# Altium PCB roverDriveBrushless.PcbDoc
Units mm, origin at the board's own origin, x right, y up, seen from the top; angles counter-clockwise.
Board outline 70 x 60 mm, 4 copper layers (Top Layer, Int1 (GND), Int2 (PWR), Bottom Layer), stack 1.585 mm thick; 130 components, 70 nets, 426 pads, 0 vias.
Unrouted connection lines stored in the file: 288.
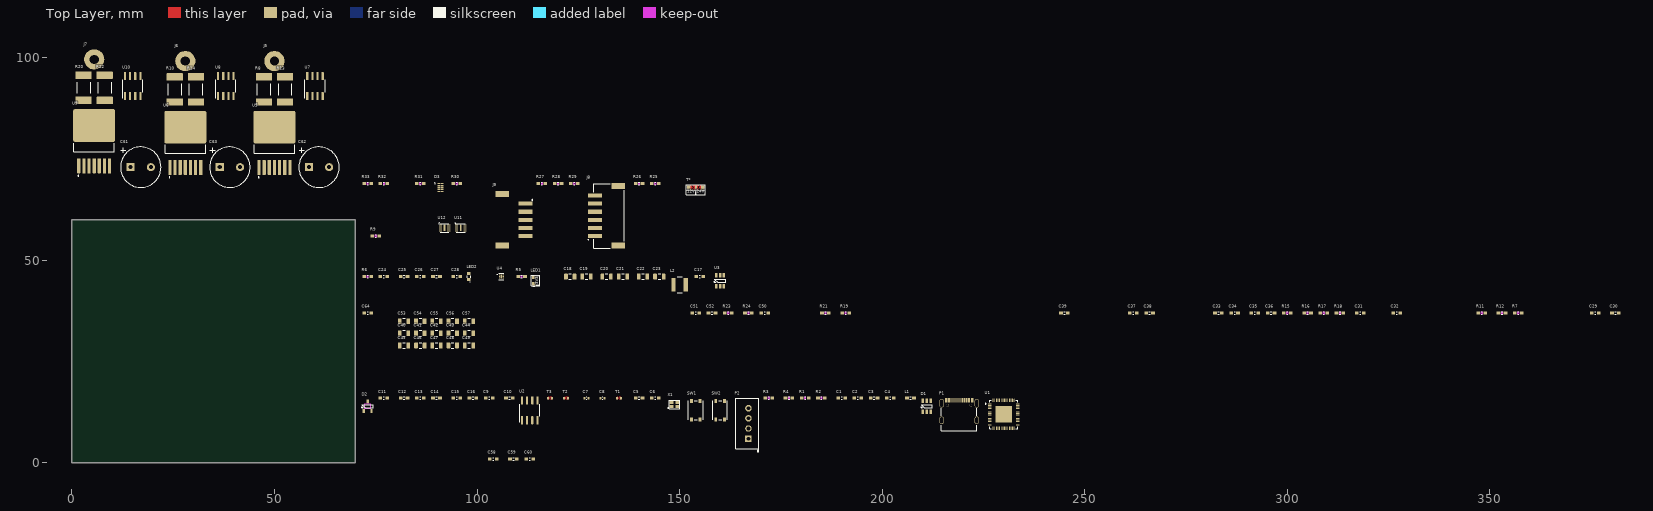
[diagram p0: Top Layer view]
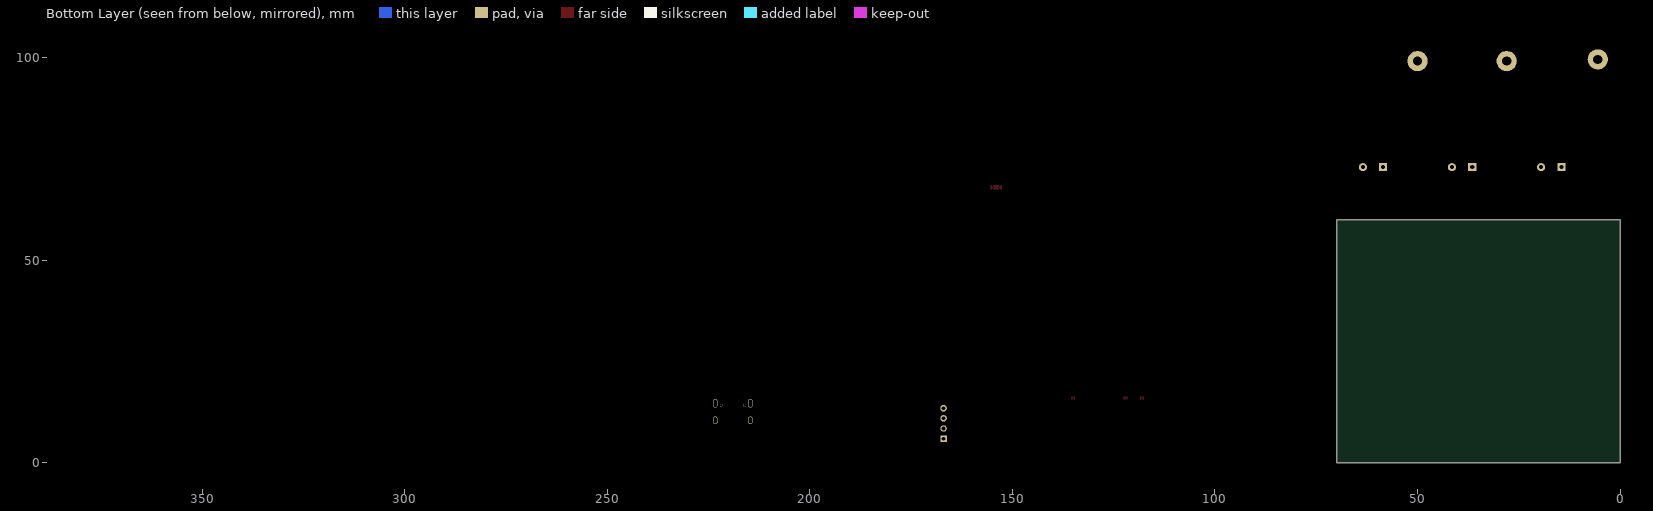
[diagram p1: Bottom Layer view, seen from below]

## Layer stack, top to bottom
Top Solder: solder mask 0.035, SM-001, Dk 4
Top Layer: signal copper 0.035
Dielectric 2: prepreg 0.21, PP-017, Dk 4.6
Int1 (GND): signal copper 0.015
Dielectric 3: core 1.065, Core-039, Dk 4.6
Int2 (PWR): signal copper 0.015
Dielectric 4: prepreg 0.21, PP-017, Dk 4.6
Bottom Layer: signal copper 0.035
Bottom Solder: solder mask 0.035, SM-001, Dk 4

## Board outline
0,0 70,0 70,60 0,60

## Design rules (kind name [scope] priority, off if disabled: settings)
BoardOutlineClearance [not(OnLayer('Top Overlay') OR OnLayer('Bottom Overlay'))] p1: gap=0.3 ignorepadtopadclearanceinfootprint=FALSE except(0: Text-OutlineEdge Text-CavityEdge Text-CutoutEdge Text-SplitBarrior Text-SplitContinuation)
Clearance Clearance_Power [InNetClass('Power')] p1: gap=0.127 ignorepadtopadclearanceinfootprint=FALSE
Clearance Clearance_signal [All] p2: gap=0.125 ignorepadtopadclearanceinfootprint=FALSE
ComponentClearance [All] p1 off: gap=0.254 collisioncheckmode=3 verticalgap=0.254 showdistances=FALSE
DiffPairsRouting eth_100 [Not InDifferentialPair('USB')] p1: maxlimit=0.254 minlimit=0.127 mostfreqgap=0.254 toplayer_maxgap=0.127 toplayer_prefgap=0.127 toplayer_minwidth=0.125 toplayer_maxwidth=0.125 toplayer_prefwidth=0.125 bottomlayer_maxgap=0.127 bottomlayer_prefgap=0.127 bottomlayer_minwidth=0.125 bottomlayer_maxwidth=0.125 bottomlayer_prefwidth=0.125 impedanceprofiledriven=TRUE impedanceprofileid={BED762A8-9934-435E-9BAB-1C0AACEE0ECA} impedanceprofilevalue=100.000000 maxuncoupledlength=12.7
DiffPairsRouting USB_diff [InDifferentialPair('USB') or InDifferentialPair('USB_ESP')] p2: maxlimit=0.254 minlimit=0.127 mostfreqgap=0.254 toplayer_maxgap=0.127 toplayer_prefgap=0.127 toplayer_minwidth=0.182 toplayer_maxwidth=0.182 toplayer_prefwidth=0.182 bottomlayer_maxgap=0.127 bottomlayer_prefgap=0.127 bottomlayer_minwidth=0.182 bottomlayer_maxwidth=0.182 bottomlayer_prefwidth=0.182 impedanceprofiledriven=TRUE impedanceprofileid={FA6609CF-BA32-4F74-B84B-CE5609EF71AF} impedanceprofilevalue=90.000000 maxuncoupledlength=12.7
HoleSize [All] p1 off: absolutevalues=TRUE maxlimit=2.54 minlimit=0.025 maxpercent=80.000 minpercent=20.000
MinimumSolderMaskSliver [All] p1 off: minsoldermaskwidth=0.254
PasteMaskExpansion [All] p1 off: expansion=0
PolygonConnect PolygonConnect_Power [InNetClass('Power')] p1: connectstyle=Direct reliefconductorwidth=0.254 reliefentries=4 polygonreliefangle="90 Angle" airgapwidth=0.254
PolygonConnect PolygonConnectGND [All vs InNet('GND')] p2: thpad.connectstyle=Relief thpad.reliefconductorwidth=0.4 thpad.reliefentries=4 thpad.polygonreliefangle="90 Angle" thpad.airgapwidth=0.18 smdpad.connectstyle=Relief smdpad.reliefconductorwidth=0.4 smdpad.reliefentries=4 smdpad.polygonreliefangle="90 Angle" smdpad.airgapwidth=0.18 via.connectstyle=Direct via.reliefconductorwidth=0.254 via.reliefentries=4 via.polygonreliefangle="90 Angle" via.airgapwidth=0.254
PolygonConnect [All] p3: connectstyle=Direct reliefconductorwidth=0.254 reliefentries=4 polygonreliefangle="90 Angle" airgapwidth=0.254
RoutingVias [All] p1: holewidth=0.3 width=0.5 viastyle="Through Hole" minholewidth=0.15 minwidth=0.25 maxholewidth=1 maxwidth=1.3
SilkToSolderMaskClearance [IsPad] p1 off: minsilkscreentomaskgap=0.254 clearancetoexposedcopper=TRUE
SolderMaskExpansion [All] p1 off: expansion=0.102 istentingtop=FALSE
Width Width_Power(5A) [InNetClass('Power')] p1: maxlimit=2 minlimit=0.2 preferedwidth=1.25
Width Width_signal [All] p2: maxlimit=1 minlimit=0.1 preferedwidth=0.2 minimp=50.000000 maximp=50.000000 favimp=50.000000
24 further rules are at their usual default settings.

## Classes and differential pairs
net class LOW_POWER: 3V3 5V
component class Sensors: D1 J5 J8 R1 R25 R26 R28 R29 R30 R31 R32 R33 T* U11 U12
component class MotorDriver: C29 C30 C31 C32 C33 C34 C35 C36 C37 C38 C39 C40 C41 C42 C43 C44 C45 C46 C47 C48 C49 C50 C51 C52 C53 C54 C55 C56 C57 C58 C59 C60 C61 C62 C63 C64 J5 J6 J7 R7 R8 R9 R10 R11 R12 R13 R14 R15 R16 R17 R18 R19 R20 R21 R22 R23 R24 U5 U6 U7 U8 U9 U10
differential pair class USB: USB
component class Power: C15 C17 C18 C19 C20 C22 C23 C24 C25 C26 C27 C28 L2 LED1 LED2 R5 R6 U3 U4
component class ESP32: C1 C2 C3 C4 C5 C6 C7 C8 C9 C10 C11 C12 C13 C14 C15 C16 D1 D2 L2 P2 R1 R2 R3 R4 SW1 T1 T3 U1 U2 X1
net class Power: NetR8_1 NetR10_1 NetR20_1 Phase_1 Phase_2 Phase_3
differential pair USB: +USB_P -USB_N

## Components (designator, comment, footprint, x,y, rotation, side; value= is the part's Value field where it differs from the comment)
C1 "Capacitor-0603-0.1uF-50V-X7R" CAPACITOR-0603 190,16 r0 top value=0.1uF
C2 "Capacitor-0603-0.1uF-50V-X7R" CAPACITOR-0603 194,16 r0 top value=0.1uF
C3 "Capacitor-0603-1uF-25V-X5R" CAPACITOR-0603 198,16 r0 top value=1uF
C4 "Capacitor-0603-10uF-10V-X5R" CAPACITOR-0603 202,16 r0 top value=10uF
C5 "Capacitor-0603-1uF-25V-X5R" CAPACITOR-0603 140,16 r0 top value=1uF
C6 "Capacitor-0603-0.1uF-50V-X7R" CAPACITOR-0603 144,16 r0 top value=0.1uF
C7 "Capacitor-0402-10pF-50V-C0G" CAPACITOR-0402 127,16 r0 top value=10pF
C8 "Capacitor-0402-10pF-50V-C0G" CAPACITOR-0402 131,16 r0 top value=10pF
C9 "Capacitor-0603-0.1uF-50V-X7R" CAPACITOR-0603 103,16 r0 top value=0.1uF
C10 "Capacitor-0603-10uF-10V-X5R" CAPACITOR-0603 108,16 r0 top value=10uF
C11 "Capacitor-0603-10nF-25V-X5R" CAPACITOR-0603 77,16 r0 top value=10nF
C12 "Capacitor-0603-1uF-25V-X5R" CAPACITOR-0603 82,16 r0 top value=1uF
C13 "Capacitor-0603-0.1uF-50V-X7R" CAPACITOR-0603 86,16 r0 top value=0.1uF
C14 "Capacitor-0603-0.1uF-50V-X7R" CAPACITOR-0603 90,16 r0 top value=0.1uF
C15 "Capacitor-0603-0.1uF-50V-X7R" CAPACITOR-0603 95,16 r0 top value=0.1uF
C16 "Capacitor-0603-1uF-25V-X5R" CAPACITOR-0603 99,16 r0 top value=1uF
C17 "Capacitor-0603-0.1uF-50V-X7R" CAPACITOR-0603 155,46 r0 top value=0.1uF
C18 "Capacitor-0805-10uF-35V-X5R" CAPACITOR-0805 123,46 r0 top value=10uF
C19 "Capacitor-0805-10uF-35V-X5R" CAPACITOR-0805 127,46 r0 top value=10uF
C20 "Capacitor-0805-22uF-16V-X5R" CAPACITOR-0805 132,46 r0 top value=22uF
C21 "Capacitor-0805-22uF-16V-X5R" CAPACITOR-0805 136,46 r0 top value=22uF
C22 "Capacitor-0805-22uF-16V-X5R" CAPACITOR-0805 141,46 r0 top value=22uF
C23 "Capacitor-0805-22uF-16V-X5R" CAPACITOR-0805 145,46 r0 top value=22uF
C24 "Capacitor-0603-1uF-25V-X5R" CAPACITOR-0603 77,46 r0 top value=1uF
C25 "Capacitor-0603-10uF-10V-X5R" CAPACITOR-0603 82,46 r0 top value=10uF
C26 "Capacitor-0603-10uF-10V-X5R" CAPACITOR-0603 86,46 r0 top value=10uF
C27 "Capacitor-0603-10uF-10V-X5R" CAPACITOR-0603 90,46 r0 top value=10uF
C28 "Capacitor-0603-10uF-10V-X5R" CAPACITOR-0603 95,46 r0 top value=10uF
C29 "Capacitor-0603-0.22uF-50V-X7R" CAPACITOR-0603 376,37 r0 top value=0.22uF
C30 "Capacitor-0603-0.22uF-50V-X7R" CAPACITOR-0603 381,37 r0 top value=0.22uF
C31 "Capacitor-0603-0.22uF-50V-X7R" CAPACITOR-0603 318,37 r0 top value=0.22uF
C32 "Capacitor-0603-0.22uF-50V-X7R" CAPACITOR-0603 327,37 r0 top value=0.22uF
C33 "Capacitor-0603-2.2uF-16V-X5R" CAPACITOR-0603 283,37 r0 top value=2.2uF
C34 "Capacitor-0603-0.1uF-50V-X7R" CAPACITOR-0603 287,37 r0 top value=0.1uF
C35 "Capacitor-0603-2.2uF-16V-X5R" CAPACITOR-0603 292,37 r0 top value=2.2uF
C36 "Capacitor-0603-0.1uF-50V-X7R" CAPACITOR-0603 296,37 r0 top value=0.1uF
C37 "Capacitor-0603-0.1uF-50V-X7R" CAPACITOR-0603 262,37 r0 top value=0.1uF
C38 "Capacitor-0603-0.1uF-50V-X7R" CAPACITOR-0603 266,37 r0 top value=0.1uF
C39 "Capacitor-0603-0.22uF-50V-X7R" CAPACITOR-0603 245,37 r0 top value=0.22uF
C40 "Capacitor-0805-10uF-50V-X5R" CAPACITOR-0805 82,32 r0 top value=10uF
C41 "Capacitor-0805-10uF-50V-X5R" CAPACITOR-0805 86,32 r0 top value=10uF
C42 "Capacitor-0805-10uF-50V-X5R" CAPACITOR-0805 90,32 r0 top value=10uF
C43 "Capacitor-0805-10uF-50V-X5R" CAPACITOR-0805 94,32 r0 top value=10uF
C44 "Capacitor-0805-10uF-50V-X5R" CAPACITOR-0805 98,32 r0 top value=10uF
C45 "Capacitor-0805-10uF-50V-X5R" CAPACITOR-0805 82,29 r0 top value=10uF
C46 "Capacitor-0805-10uF-50V-X5R" CAPACITOR-0805 86,29 r0 top value=10uF
C47 "Capacitor-0805-10uF-50V-X5R" CAPACITOR-0805 90,29 r0 top value=10uF
C48 "Capacitor-0805-10uF-50V-X5R" CAPACITOR-0805 94,29 r0 top value=10uF
C49 "Capacitor-0805-10uF-50V-X5R" CAPACITOR-0805 98,29 r0 top value=10uF
C50 "Capacitor-0603-0.22uF-50V-X7R" CAPACITOR-0603 171,37 r0 top value=0.22uF
C51 "Capacitor-0603-2.2uF-16V-X5R" CAPACITOR-0603 154,37 r0 top value=2.2uF
C52 "Capacitor-0603-0.1uF-50V-X7R" CAPACITOR-0603 158,37 r0 top value=0.1uF
C53 "Capacitor-0805-10uF-50V-X5R" CAPACITOR-0805 82,35 r0 top value=10uF
C54 "Capacitor-0805-10uF-50V-X5R" CAPACITOR-0805 86,35 r0 top value=10uF
C55 "Capacitor-0805-10uF-50V-X5R" CAPACITOR-0805 90,35 r0 top value=10uF
C56 "Capacitor-0805-10uF-50V-X5R" CAPACITOR-0805 94,35 r0 top value=10uF
C57 "Capacitor-0805-10uF-50V-X5R" CAPACITOR-0805 98,35 r0 top value=10uF
C58 "Capacitor-0603-0.1uF-50V-X7R" CAPACITOR-0603 104,1 r0 top value=0.1uF
C59 "Capacitor-0603-0.1uF-50V-X7R" CAPACITOR-0603 109,1 r0 top value=0.1uF
C60 "Capacitor-0603-0.1uF-50V-X7R" CAPACITOR-0603 113,1 r0 top value=0.1uF
C61 "CAP ALUM 680UF 20% 35V TH ESR 18mR" CAPACITOR-Aluminium-10.0x16mm-5mmPitch 17,73 r90 top value=680uF
C62 "CAP ALUM 680UF 20% 35V TH ESR 18mR" CAPACITOR-Aluminium-10.0x16mm-5mmPitch 61,73 r90 top value=680uF
C63 "CAP ALUM 680UF 20% 35V TH ESR 18mR" CAPACITOR-Aluminium-10.0x16mm-5mmPitch 39,73 r90 top value=680uF
C64 "Capacitor-0603-0.1uF-50V-X7R" CAPACITOR-0603 73,37 r0 top value=0.1uF
D1 "NUP4301MR6T1G" SOT-23-6 211,14 r0 top
D2 "ESDCAN24-2BLY" SOT-23-3 73,14 r0 top
D3 "D3V3F4U10LP-7" U-DFN2510-10 91,68 r0 top
J5 "hole" HOLE-M2-Bolt 50,99.2 r0 top
J6 "hole" HOLE-M2-Bolt 28,99.2 r0 top
J7 "hole" HOLE-M2-Bolt 5.5,99.6 r0 top
J8 "S6B-PH-SM4-TB(LF)(SN)" JST_S6B-PH-SM4-TB(LF)(SN) 132,61 r90 top
J9 "S5B-PH-SM4-TB" JST_S5B-PH-SM4-TB 112,60 r90 top
L1 "2506036007Y3" CAPACITOR-0603 207,16 r0 top value=60R@100MHz
L2 "ASPI-4030S-4R7M-T" INDUCTOR_ASPI-4030S-100M 150,44 r0 top value=4.7uH
LED1 "3147-B1911NG--20D000214U1930CT-ND" LED-0603-2PIN-SILKSCREEN 114,45 r90 top
LED2 "B1911USD-20D000114U1930" LED-0603-2PIN 98,46 r90 top
P1 "USB4105-GF-A" USB-C 219,13 r0 top
P2 "JST_XH_4_Pos" JST_XH_4_Pos 167,6 r90 top
R1 "Resistor-0603-5.1k" RESISTOR-0603 181,16 r0 top value=5.1k
R2 "Resistor-0603-5.1k" RESISTOR-0603 185,16 r0 top value=5.1k
R3 "SMT resistor" Resistor-0603 172,16 r0 top value=10k
R4 "SMT resistor" Resistor-0603 177,16 r0 top value=10k
R5 "SMT resistor" Resistor-0603 111,46 r0 top value=1k
R6 "SMT resistor" Resistor-0603 73,46 r0 top value=1k
R7 "SMT resistor" Resistor-0603 357,37 r0 top value=10k
R8 "SMT resistor" RESISTOR-2512 47.4,92.2 r90 top value=2mR
R9 "SMT resistor" Resistor-0603 75,56 r0 top value=10k
R10 "SMT resistor" RESISTOR-2512 25.4,92.2 r90 top value=2mR
R11 "SMT resistor" Resistor-0603 348,37 r0 top value=10k
R12 "SMT resistor" Resistor-0603 353,37 r0 top value=10k
R13 "SMT resistor" RESISTOR-2512 52.6,92.2 r90 top value=2mR
R14 "SMT resistor" RESISTOR-2512 30.6,92.2 r90 top value=2mR
R15 "SMT resistor" Resistor-0603 300,37 r0 top value=1k
R16 "SMT resistor" Resistor-0603 305,37 r0 top value=0
R17 "SMT resistor" Resistor-0603 309,37 r0 top value=1k
R18 "SMT resistor" Resistor-0603 313,37 r0 top value=0
R19 "SMT resistor" Resistor-0603 191,37 r0 top value=10k
R20 "SMT resistor" RESISTOR-2512 2.9,92.6 r90 top value=2mR
R21 "SMT resistor" Resistor-0603 186,37 r0 top value=10k
R22 "SMT resistor" RESISTOR-2512 8.1,92.6 r90 top value=2mR
R23 "SMT resistor" Resistor-0603 162,37 r0 top value=1k
R24 "SMT resistor" Resistor-0603 167,37 r0 top value=0
R25 "SMT resistor" Resistor-0603 144,69 r0 top value=1.69k
R26 "SMT resistor" Resistor-0603 140,69 r0 top value=3.3k
R27 "SMT resistor" Resistor-0603 116,69 r0 top value=4.7k
R28 "SMT resistor" Resistor-0603 120,69 r0 top value=4.7k
R29 "SMT resistor" Resistor-0603 124,69 r0 top value=4.7k
R30 "SMT resistor" Resistor-0603 95,69 r0 top value=1.69k
R31 "SMT resistor" Resistor-0603 86,69 r0 top value=3.3k
R32 "SMT resistor" Resistor-0603 77,69 r0 top value=1.69k
R33 "SMT resistor" Resistor-0603 73,69 r0 top value=3.3k
SW1 "PTS815 SJM 250 SMTR LFS" "SW4_PTS815 SJM 250 SMTR LFS_CNK" 154,13 r0 top
SW2 "PTS815 SJM 250 SMTR LFS" "SW4_PTS815 SJM 250 SMTR LFS_CNK" 160,13 r0 top
T1 "NetTie_0402" NetTie-0402 135,16 r0 top
T2 "NetTie_0402" NetTie-0402 122,16 r0 top
T3 "NetTie_0402" NetTie-0402 118,16 r0 top
T* "Jumper-3pos-small" Jumper-3pos-small-silkscreen 154,68 r0 top
U1 "ESP32-S3FN8-SOC" "VFQFN-56 Exposed Pad" 230,12 r0 top
U2 "SN65HVD232DR" SOIC-8 113,13 r0 top
U3 "AP63205WU-7" SOT-23-6 160,45 r0 top
U4 "NCP176AMX330TCG" "XFDFN-6 Exposed Pad" 106,46 r0 top
U5 "IFX007TAUMA1" DPAK127P1500X440-8N 50,79 r90 top
U6 "IFX007TAUMA1" DPAK127P1500X440-8N 28,79 r90 top
U7 "INA240A2QDRQ1" SOIC-8 60,93 r0 top
U8 "INA240A2QDRQ1" SOIC-8 38,93 r0 top
U9 "IFX007TAUMA1" DPAK127P1500X440-8N 5.5,79.4 r90 top
U10 "INA240A2QDRQ1" SOIC-8 15,93 r0 top
U11 "LM358QT" DFN8-2x2 96,58 r0 top
U12 "LM358QT" DFN8-2x2 92,58 r0 top
X1 "CX2016DB40000D0FLJCC" 4-SMD 148,15 r0 top

## Footprints (in the part's own frame and the unit in brackets; to place one, negate y for a bottom-side part, rotate by r counter-clockwise, add the part's x,y. Pads: shape width x height; smd on the part's side, far side on the other; paste and mask are expansions set on the pad)
4-SMD [mm]
  rect 0.9x0.8 smd: 1(0,-1.1) 2(1.4,-1.1) 3(1.4,0) 4(0,0)
  silkscreen extent -0.87,-1.6 2,0.5
CAPACITOR-0402 [mm] "Metric 1005, EIA 0402. Per Yageo Product Specification V2.6"
  rrect15% 0.5x0.6 smd: 1(-0.5,0) 2(0.5,0)
  Top Layer pour cut-out: -0.3,0.25 0.3,0.25 0.3,-0.25 -0.3,-0.25
  silkscreen extent -0.05,-0.3 0.05,0.3, body extent -0.5,-0.27 0.5,0.28, height 0.51
CAPACITOR-0603 [mm] "Metric 1608, EIA 0603. Per Yageo Product Specification V2.2"
  rrect15% 0.9x0.8 smd: 1(-0.85,0) 2(0.85,0)
  Top Layer pour cut-out: -0.2,0.2 0.2,0.2 0.2,-0.2 -0.2,-0.2
  silkscreen extent -0.15,-0.3 0.15,0.3, body extent -0.93,-0.41 0.93,0.41, height 0.81
CAPACITOR-0805 [mm] "Metric 2012, EIA 0805, Per Yageo Product Specification V2.2"
  rrect15% 0.9x1.4 smd: 1(-1.05,0) 2(1.05,0)
  silkscreen extent -0.3,-0.7 0.3,0.7, body extent -1.09,-0.64 1.09,0.64, height 1.26
CAPACITOR-Aluminium-10.0x16mm-5mmPitch [mm] "10.0mm dia x 13mm height Capacitor"
  rect 2x2 hole 1: 1(0,2.5)
  round 2 hole 1: 2(0,-2.5)
  silkscreen extent -5,-5 5,5, body extent -5,-4.98 5,4.99, height 18
DFN8-2x2 [mm]
  rect 0.75x0.3 smd mask+0.08: 1(-1.02,0.75) 2(-1.02,0.25) 3(-1.02,-0.25) 4(-1.02,-0.75) 5(1.02,-0.75) 6(1.02,-0.25) 7(1.02,0.25) 8(1.02,0.75)
  rect 0.45x1.6 smd: 9(0,0)
  silkscreen extent -1.43,-1.08 1.08,1.23, body extent -1,-1 1,1, height 0.6
DPAK127P1500X440-8N [mm]
  rrect25% 3.67x0.79 smd: 1(-6.07,3.81) 2(-6.07,2.54) 3(-6.07,1.27) 4(-6.07,0) 5(-6.07,-1.27) 6(-6.07,-2.54) 7(-6.07,-3.81)
  rrect10% 8.04x10.37 smd paste-6: 8(3.89,0)
  silkscreen extent -8.6,-5 -0.44,5, body extent -7.41,-5 7.54,5, height 4.4
HOLE-M2-Bolt [mm] "Hole M2 Bolt"
  round 5 hole 2.3: 1(0,0)
INDUCTOR_ASPI-4030S-100M [mm]
  rect 1.1x3.4 smd: 1(-1.5,0) 2(1.5,0)
  silkscreen extent -0.64,-2 0.64,2, body extent -2,-2 2,2, height 3
JST_S5B-PH-SM4-TB [mm]
  rect 1x3.5 smd: 1(4,0) 2(2,0) 3(0,0) 4(-2,0) 5(-4,0)
  rect 1.5x3.4 smd: P1(6.35,5.75) P2(-6.35,5.75)
  silkscreen extent 4.77,-1.73 5.03,-1.47, body extent -6.95,-1.14 6.95,7.46, height 5.6
JST_S6B-PH-SM4-TB(LF)(SN) [mm]
  rect 1x3.5 smd: 1(-5,2.875) 2(-3,2.875) 3(-1,2.875) 4(1,2.875) 5(3,2.875) 6(5,2.875)
  rect 1.5x3.4 smd: S1(-7.35,-2.875) S2(7.35,-2.875)
  silkscreen extent -7.95,-4.38 7.95,4.58, body extent -7.87,-4.35 8.03,4.25, height 5.5
JST_XH_4_Pos [mm]
  rect 1.6x1.6 hole 0.9: 1(0,0)
  round 1.6 hole 1: 2(2.5,0)
  round 1.6 hole 0.9: 3(5,0) 4(7.5,0)
  silkscreen extent -3.3,-2.6 10,3.1, body extent -2.45,-2.35 9.95,3.4, height 7
Jumper-3pos-small-silkscreen [mm] "3 pos selection"
  rect 0.9x1 smd paste+0 mask+0.102: 1(-1.7,0) 2(1.7,0)
  rect 0.5x1 smd paste+0: 3(0,0)
  Top Layer region: 0,0.5 0.75,0.5 0.625,0.3 0.425,0 0.625,-0.3 0.75,-0.5 0,-0.5
  Top Layer region: 1.35,0.5 1.125,0.5 1,0.3 0.8,0 1,-0.3 1.125,-0.5 1.35,-0.5
  Top Layer region: 0,0.5 -0.75,0.5 -0.625,0.3 -0.425,0 -0.625,-0.3 -0.75,-0.5 0,-0.5
  Top Layer region: -1.35,0.5 -1.125,0.5 -1,0.3 -0.8,0 -1,-0.3 -1.125,-0.5 -1.35,-0.5
  silkscreen extent -2.3,-1.8 2.3,0.7
LED-0603-2PIN [mm] "Metric 1608, EIA 0603. Per Yageo Product Specification V2.2"
  rrect15% 0.8x0.9 smd: 1(-0.75,0) 2(0.75,0)
  Top Layer pour cut-out: -0.35,0.45 0.35,0.45 0.35,-0.45 -0.35,-0.45
  silkscreen extent -1.22,-0.45 0.25,0.45, body extent -0.8,-0.4 0.8,0.4, height 0.8
LED-0603-2PIN-SILKSCREEN [mm] "Metric 1608, EIA 0603. Per Yageo Product Specification V2.2"
  rrect15% 0.8x0.9 smd: 1(-0.75,0) 2(0.75,0)
  Top Layer pour cut-out: -0.35,0.45 0.35,0.45 0.35,-0.45 -0.35,-0.45
  silkscreen extent -1.35,-1.5 1.3,0.6, body extent -0.8,-0.4 0.8,0.4, height 0.8
NetTie-0402 [mm] "Metric 1005, EIA 0402 Drawn per Yageo \"Chip resistors Mounting\" rev 10"
  rrect15% 0.5x0.6 smd: 1(-0.5,0) 2(0.5,0)
  Top Layer region: 0.475,0.3 0.05,0.3 0.25,0 0.05,-0.3 0.375,-0.3 0.475,-0.3
  Top Layer region: -0.375,0.3 -0.225,0.3 -0.025,0 -0.225,-0.3 -0.375,-0.3
  body extent -0.51,-0.25 0.51,0.25, height 0.51
RESISTOR-0603 [mm] "Metric 1608, EIA 0603 Drawn per Yageo \"Chip resistors Mounting\" rev 10"
  rrect15% 0.9x0.8 smd: 1(-0.85,0) 2(0.85,0)
  Top Layer pour cut-out: -0.2,0.2 0.2,0.2 0.2,-0.2 -0.2,-0.2
  Top Layer keep-out region: -0.2,-0.2 0.2,-0.2 0.2,0.2 -0.2,0.2
  silkscreen extent -0.15,-0.3 0.15,0.3, body extent -0.8,-0.4 0.8,0.4, height 0.55
Resistor-0603 [mm] "Metric 1608, EIA 0603 Drawn per Yageo \"Chip resistors Mounting\" rev 10"
  rrect15% 0.9x0.8 smd: 1(-0.85,0) 2(0.85,0)
  Top Layer pour cut-out: -0.2,0.2 0.2,0.2 0.2,-0.2 -0.2,-0.2
  Top Layer keep-out region: -0.2,-0.2 0.2,-0.2 0.2,0.2 -0.2,0.2
  silkscreen extent -0.15,-0.3 0.15,0.3, body extent -0.8,-0.4 0.8,0.4, height 0.55
RESISTOR-2512 [mm] "Metric 6432, EIA 2512 Drawn per Yageo \"Chip resistors Mounting\" rev 10"
  rrect10% 1.8x4 smd: 1(-3.1,0) 2(3.1,0)
  Top Layer pour cut-out: -2.3,2 2.3,2 2.3,-2 -2.3,-2
  silkscreen extent -1.4,-1.6 1.4,1.6, body extent -3.2,-1.6 3.2,1.6, height 0.6
SOIC-8 [mil] "8-Lead Plastic Small Outline, 0.15in pitch,  LTC DWG # 05-08-1610 Rev G"
  rrect25% 21x78 smd: 1(-75,-97) 2(-25,-97) 3(25,-97) 4(75,-97) 5(75,97) 6(25,97) 7(-25,97) 8(-75,97)
  silkscreen extent -98,-118 98,60, body extent -98,-122 98,122, height 69
SOT-23-3 [mm] "SOT23-3, from TI DBZ (R-PDSO-G3)"
  rrect15% 0.6x1.05 smd: 1(-0.95,-1.185) 2(0.95,-1.185) 3(0,1.185)
  Top Layer keep-out region: -0.8,-0.5 0.8,-0.5 0.8,0.5 -0.8,0.5
  silkscreen extent -1.4,-0.4 1.4,0.4, body extent -1.45,-1.21 1.45,1.21, height 0.98
SOT-23-6 [mm] "SOT23-6, from TI DDC (R-PDSO-G6)"
  rrect15% 0.6x1.1 smd: 1(-0.95,-1.35) 2(0,-1.35) 3(0.95,-1.35) 4(0.95,1.35) 5(0,1.35) 6(-0.95,1.35)
  silkscreen extent -1.4,-0.4 1.4,0.4, body extent -1.5,-1.37 1.5,1.38, height 1.1
"SW4_PTS815 SJM 250 SMTR LFS_CNK" [mm]
  rect 0.711x0.991 smd paste+0: 1(1.075,2.25) 2(1.075,-2.25) 3(-1.075,2.25) 4(-1.075,-2.25)
  silkscreen extent -1.8,-2.35 1.8,2.32, body extent -1.83,-2.32 1.83,2.32, height 3
U-DFN2510-10 [mm]
  rect 0.625x0.25 smd mask+0.05: 1(-0.387,1) 2(-0.387,0.5) 4(-0.387,-0.5) 5(-0.387,-1) 6(0.387,-1) 7(0.387,-0.5) 9(0.387,0.5) 10(0.387,1)
  rect 0.7x0.45 smd mask+0.05: 3(-0.35,0)
  rect 0.575x0.45 smd mask+0.05: 8(0.413,0)
  silkscreen extent -1.49,0.9 -1.29,1.1, body extent -0.5,-1.25 0.5,1.25, height 0.61
USB-C [mm]
  oval 1x1.9 hole 0.6 slot 1.5 at 90 deg: 13(-4.325,-2.481) 13(4.325,-2.481)
  oval 1x2.1 hole 0.6 slot 1.8 at 90 deg: 13(-4.325,1.719) 13(4.325,1.719)
  rect 0.6x1.15 smd mask+0.08: A1B12(-3.2,2.481) A4B9(-2.4,2.481) B1A12(3.2,2.481) B4A9(2.4,2.481)
  rect 0.3x1.15 smd mask+0.08: A5(-1.25,2.481) A6(-0.25,2.481) A7(0.25,2.481) A8(1.25,2.481) B5(1.75,2.481) B6(0.75,2.481) B7(-0.75,2.481) B8(-1.75,2.481)
  round 0.65 hole 0.65 unplated: ""(-2.89,1.219) ""(2.89,1.219)
  silkscreen extent -4.4,-5.08 4.4,0.44, body extent -4.47,-5.08 4.47,2.52, height 3.28
"VFQFN-56 Exposed Pad" [mm] "56-QFN (7x7) ESP32S3"
  rrect25% 0.81x0.22 smd: 1(-3.445,2.6) 2(-3.445,2.2) 3(-3.445,1.8) 4(-3.445,1.4) 5(-3.445,1) 6(-3.445,0.6) 7(-3.445,0.2) 8(-3.445,-0.2) 9(-3.445,-0.6) 10(-3.445,-1) 11(-3.445,-1.4) 12(-3.445,-1.8) 13(-3.445,-2.2) 14(-3.445,-2.6) 29(3.445,-2.6) 30(3.445,-2.2) 31(3.445,-1.8) 32(3.445,-1.4) 33(3.445,-1) 34(3.445,-0.6) 35(3.445,-0.2) 36(3.445,0.2) 37(3.445,0.6) 38(3.445,1) 39(3.445,1.4) 40(3.445,1.8) 41(3.445,2.2) 42(3.445,2.6)
  rrect25% 0.22x0.81 smd: 15(-2.6,-3.445) 16(-2.2,-3.445) 17(-1.8,-3.445) 18(-1.4,-3.445) 19(-1,-3.445) 20(-0.6,-3.445) 21(-0.2,-3.445) 22(0.2,-3.445) 23(0.6,-3.445) 24(1,-3.445) 25(1.4,-3.445) 26(1.8,-3.445) 27(2.2,-3.445) 28(2.6,-3.445) 43(2.6,3.445) 44(2.2,3.445) 45(1.8,3.445) 46(1.4,3.445) 47(1,3.445) 48(0.6,3.445) 49(0.2,3.445) 50(-0.2,3.445) 51(-0.6,3.445) 52(-1,3.445) 53(-1.4,3.445) 54(-1.8,3.445) 55(-2.2,3.445) 56(-2.6,3.445)
  rect 4x4 smd paste-3: 57(0,0)
  silkscreen extent -4.55,-3.5 3.5,3.5, body extent -3.5,-3.5 3.5,3.5, height 0.9
"XFDFN-6 Exposed Pad" [mm]
  rrect25% 0.31x0.25 smd: 1(-0.455,0.4) 2(-0.455,0) 3(-0.455,-0.4) 4(0.455,-0.4) 5(0.455,0) 6(0.455,0.4)
  rect 0.3x0.94 smd paste-1: 7(0,0)
  silkscreen extent -1.05,-0.84 0.63,0.84, body extent -0.62,-0.62 0.62,0.62, height 0.46

## Part data
C1 C2 C6 C9 C13 C14 C15 C17 C34 C36 C37 C38 C52 C58 C59 C60 C64: Package / Case="Metric 1608, EIA 0603", Supplier Part Number 1=1276-1935-2-ND, Volt=50V, Mounted=Yes, Precision=X7R-10%, Supplier 1=Digi-Key, Supplier 2=Digi-Key, Supplier Part Number 2=1276-1934-2-ND
C3 C5 C12 C16 C24: Package / Case="Metric 1608, EIA 0603", Supplier Part Number 1=1276-1859-2-ND, Volt=25V, Mounted=Yes, Precision=X5R-10%, Supplier 1=Digi-Key, Supplier 2=Digi-Key, Supplier Part Number 2=1276-1942-2-ND
  C5 C24: Supplier 3=Digi-Key, Supplier 4=Digi-Key
C4 C10 C25 C26 C27 C28: "10 µF ±20% 10V Ceramic Capacitor X5R 0603 (1608 Metric)", Package / Case="Metric 1608 , EIA 0603", Supplier Part Number 1=4713-GMC10X5R106M10NTCT-ND, Volt=10V, Mounted=Yes, Precision=20%, Supplier 1=Digikey
C7 C8: Package / Case="0402 (1005 Metric)", Supplier Part Number 1=399-C0402C100K5GAC7867CT-ND, Volt=50V, HelpURL=https://connect.kemet.com:7667/gateway/IntelliData-ComponentDocumentation/1.0/download/datasheet/C0402C100K5GACTU, Mounted=Yes, Precision="C0G - 10%", Supplier 1=Digi-Key, Supplier 2=Digi-Key
C11: "10000 pF ±10% 25V Ceramic Capacitor X5R 0603 (1608 Metric)", Package / Case="Metric 1608 , EIA 0603", Supplier Part Number 1=478-KGM15AR51E103KTCT-ND, Volt=25V, Mounted=Yes, Precision=X5R-10%, Supplier 1=Digikey
C18 C19: Package / Case="Metric 2012 , EIA 0805", Supplier Part Number 1=490-10515-1-ND, Volt=35V, Mounted=Yes, Precision=X5R-10%, Supplier 1=Digi-Key, Supplier 2=Digi-Key
C20 C21 C22 C23: Package / Case="Metric 2012 , EIA 0805", Supplier Part Number 1=1276-6780-1-ND, Volt=16V, Mounted=Yes, Precision=X5R-10%, Supplier 1=Digi-Key, Supplier 2=Digi-Key
C29 C30 C31 C32 C39 C50: Package / Case="Metric 1608, EIA 0603", Supplier Part Number 1=1276-6600-1-ND, Volt=50V, Mounted=Yes, Precision=X7R-10%, Supplier 1=Digi-Key, Supplier 2=Digi-Key
C33 C35 C51: "2.2 µF ±10% 16V Ceramic Capacitor X5R 0603 (1608 Metric)", Package / Case="Metric 1608 , EIA 0603", Supplier Part Number 1=1276-1040-1-ND, Volt=16V, Mounted=Yes, Precision=X5R-10%, Supplier 1=Digikey
C40 C41 C42 C43 C44 C45 C46 C47 C48 C49 C53 C54 C55 C56 C57: Package / Case="Metric 2012 , EIA 0805", Supplier Part Number 1=490-18663-1-ND, Volt=50V, Mounted=Yes, Precision=X5R-10%, Supplier 1=Digi-Key, Supplier 2=Digi-Key
C61 C62 C63: library part Capacitor-680uF-35V-TH, Supplier Part Number 1=399-A750MW687M1VAAE018-ND, Volt=35V, ESR=18mR, Mounted=Yes, Precision=20%, Supplier 1=Digi-Key, Supplier 2=Digi-Key
D1: "4CH Clamp Ipp Tvs Diode Surface Mount SOT23-6 (SC74)", Package / Case=SOT23-6, Supplier Part Number 1=NUP4301MR6T1GOSTR-ND, Volt=70, Mounted=Yes, Supplier 1=Digi-Key
D2: "55V Clamp 6A (8/20µs) Ipp Tvs Diode Surface Mount SOT-23", Package / Case=SOT-23-3, Supplier Part Number 1=5272-ESDCAN24-2BLYCT-ND, Volt=24, Mounted=Yes, Supplier 1=Digi-Key
D3: "5V (Typ) Clamp 5A (8/20µs) Ipp Tvs Diode Surface Mount U-DFN2510-10", Package / Case=SOT23-6, Supplier Part Number 1=D3V3F4U10LP-7DICT-ND, Volt=5V, Mounted=Yes, Supplier 1=Digi-Key
J5 J6 J7: library part "Hole 2.3mm M2", "Hole for M2 Bolt with 4mm pad", Mounted=N/A
J8: "Connector Header Surface Mount, Right Angle 6 position 0.079 _2.00mm_", Package=None, Supplier Part Number 1=455-1753-1-ND, Digi-Key_Part_Number=455-1753-1-ND, Digi-Key_Purchase_URL=https://www.digikey.com/product-detail/en/jst-sales-america-inc/S6B-PH-SM4-TB_LF__SN_/455-1753-1-ND/926850?utm_source=snapeda&utm_medium=aggregator&utm_campaign=symbol, MF="JST Sales", MP=S6B-PH-SM4-TB_LF__SN_, SnapEDA_Link=https://www.snapeda.com/parts/S6B-PH-SM4-TB_LF__SN_/JST%20Sales%20America%20Inc./view-part/491647/?ref=snap, Supplier 1=Digikey
J9: "Connector Header Surface Mount, Right Angle 5 position 0.079 _2.00mm_", Package=None, Supplier Part Number 1=455-S5B-PH-SM4-TBCT-ND, Availability=Unavailable, MF="JST Sales", MP=S5B-PH-SM4-TB, Price=None, SnapEDA_Link=https://www.snapeda.com/parts/S4B-PH-SM4-TB/JST%20Sales%20America%20Inc./view-part/473686/?ref=snap, Supplier 1=Digikey
L1: "60 Ohms @ 100 MHz 1 Signal Line Ferrite Bead 0603 (1608 Metric) 3A 40mOhm", Current=3A, Package / Case=SMD, Supplier Part Number 1=1934-1396-1-ND, Mounted=Yes, Supplier 1=Digi-Key
L2: "4.7 µH Shielded Drum Core, Wirewound Inductor 2 A 60mOhm Nonstandard", Current=2A, Package / Case=SMD, Supplier Part Number 1=535-12322-1-ND, HelpURL=https://abracon.com/Magnetics/power/ASPI-4030S.pdf, Mounted=Yes, Precision=20%, Supplier 1=Digi-Key
LED1: library part LED_GREEN, "LED GREEN DIFFUSED 0603 SMD", Package / Case="0603 (1608 Metric)", Mounted=Yes, Supplier 1=Digi-Key, Supplier Part Number 1=3147-B1911NG--20D000214U1930CT-ND
LED2: "LED RED CLEAR 1608 SMD", Package / Case="0603 (1608 Metric)", Supplier Part Number 1=3147-B1911USD-20D000114U1930CT-ND, Mounted=Yes, Supplier 1=Digi-Key
P1: "CONN RCP USB2.0 TYP C 24P SMD RA / 5A", Package / Case=SMD, Supplier Part Number 1=2073-USB4105-GF-ACT-ND, Volt=N/A, Mounted=Yes, Supplier 1=Digikey
P2: "CONN HEADER VERT 4POS 2.5MM", Package / Case=TH, Supplier Part Number 1=455-2237-ND, Volt=N/A, Mounted=Yes, Supplier 1=Digi-Key
R1 R2: library part Resistor-0603-DNI, "0603 footprint DO NOT INSTALL", Package/Case="Metric 1608 , EIA 0603", Mounted=Yes
R3 R4: library part Resistor0603-10k, "Resistor0603-10k", Package / Case="Metric 1608, EIA 0603", Supplier Part Number 1=311-10.0KHRTR-ND, Mounted=Yes, Precision=1%, Supplier 1=Digi-Key, Supplier 2=Digi-Key, Supplier 3=Digi-Key, Supplier 4=Digi-Key, Supplier Part Number 2=RMCF0603FT10K0TR-ND, Watt=0.1W
R5 R6: library part Resistor0603-1k, "Resistor0603-1k", Package / Case="Metric 1608, EIA 0603", Supplier Part Number 1=RMCF0603FT1K00TR-ND, Mounted=Yes, Precision=1%, Supplier 1=Digi-Key, Supplier 2=Digi-Key, Supplier 3=Digi-Key, Supplier 4=Digi-Key, Supplier Part Number 2=311-1.00KHRTR-ND, Supplier Part Number 3=AG1307TR-ND, Watt=0.1W
R7 R9 R11 R12 R19 R21: library part Resistor-0603-10k, "Resistor0603-10k", Package / Case="Metric 1608, EIA 0603", Supplier Part Number 1=311-10.0KHRTR-ND, Mounted=Yes, Precision=1%, Supplier 1=Digi-Key, Watt=0.1W
R8 R10 R13 R14 R20 R22: library part Resistor-2512-2mR, "Resistor-2512-2mR", Package / Case="Metric 6432,  EIA 2512", Supplier Part Number 1=YAG6104CT-ND, Mounted=Yes, Precision=1%, Supplier 1=Digi-Key, Watt=2W
R15 R17 R23: library part Resistor-0603-1k, "Resistor0603-1k", Package / Case="Metric 1608, EIA 0603", Supplier Part Number 1=311-1.00KHRCT-ND, Mounted=Yes, Precision=1%, Supplier 1=Digi-Key, Watt=0.1W
R16 R18 R24: library part Resistor-0603-0.0, "Resistor0603-0.0", Package / Case="Metric 1608, EIA 0603", Supplier Part Number 1=311-0.0GRCT-ND, Mounted=Yes, Precision=1%, Supplier 1=Digi-Key, Watt=0.1W
R25 R30 R32: library part Resistor-0603-1.69k, "Resistor0603-1.69k", Package / Case="Metric 1608, EIA 0603", Supplier Part Number 1=311-1.69KHRCT-ND, Mounted=Yes, Precision=1%, Supplier 1=Digi-Key, Watt=0.25W
R26 R31 R33: library part Resistor-0603-3.3k, "Resistor0603-3.3k", Package / Case="Metric 1608, EIA 0603", Supplier Part Number 1=311-3.30KHRCT-ND, Mounted=Yes, Precision=5%, Supplier 1=Digi-Key, Watt=0.25W
R27 R28 R29: library part Resistor-0603-4.7k, "Resistor0603-4.7k", Package / Case="Metric 1608, EIA 0603", Supplier Part Number 1=13-RC0603FR-134K7LCT-ND, Mounted=Yes, Precision=1%, Supplier 1=Digi-Key, Watt=0.1W
SW1 SW2: "TACT 4.2 X 3.2, 2.5 MM H, 180GF,", Current=0.05A, Supplier Part Number 1=CKN12215-1-ND, Volt=12V, Mounted=Yes, Supplier 1=Digi-Key
U1: "IC RF TxRx + MCU Bluetooth, WiFi 802.11b/g/n, Bluetooth v5.0 2.412GHz ~ 2.484GHz 56-VFQFN Exposed Pad", Package="56-VFQFN Exposed Pad", Supplier Part Number 1=1965-ESP32-S3FN8-ND, Availability="In Stock", DigiKey Link=https://www.digikey.ca/en/products/detail/espressif-systems/ESP32-S3FN8/15822446, HelpURL=https://www.espressif.com/sites/default/files/documentation/esp32-s3_datasheet_en.pdf, MF="Espressif Systems", MP=ESP32-S3FN8, Supplier 1=Digikey
U2: "1/1 Transceiver Half CANbus 8-SOIC", Package / Case=8-SOIC, Supplier Part Number 1=296-26344-1-ND, HelpURL=https://www.ti.com/lit/ds/symlink/sn65hvd230.pdf?HQS=dis-dk-null-digikeymode-dsf-pf-null-wwe&ts=1723930967656&ref_url=https%253A%252F%252Fwww.ti.com%252Fgeneral%252Fdocs%252Fsuppproductinfo.tsp%253FdistId%253D10%2526gotoUrl%253Dhttps%253A%252F%252Fwww.ti.com%252Flit%252Fgpn%252Fsn65hvd230, Mounted=Yes, Supplier 1=Digikey
U3: "Fixed 5V@2A. 32V Input. SOT-23-6", Input Max Voltage=36V, Package / Case=SOT-23-6, Supplier Part Number 1=AP63205WU-7DICT-ND, Grade=None, HelpURL=https://www.diodes.com/assets/Datasheets/AP63200-AP63201-AP63203-AP63205.pdf, Mounted=Yes, Supplier 1=Digi-Key
U4: "IC REG LINEAR 3.3V 500mA 6-XDFN", Package / Case=SOT223, Supplier Part Number 1=NCP1117ST15T3GOSTR-ND, Mounted=Yes, Supplier 1=Digi-Key
U5 U6 U9: "Half Bridge Driver DC Motors, General Purpose Power MOSFET PG-TO263-7-1 55A 40V", Package / Case=TO-263-8, Supplier Part Number 1=IFX007TAUMA1CT-ND, Mounted=Yes, Supplier 1=Digi-Key
U7 U8 U10: library part INA240, "Current Sense Amplifier 1 Circuit 8-SOIC 50 V/V", Package / Case=8-SOIC, Supplier Part Number 1=296-49647-1-ND, HelpURL=https://www.ti.com/general/docs/suppproductinfo.tsp?distId=10&gotoUrl=https%3A%2F%2Fwww.ti.com%2Flit%2Fgpn%2Fina240, Mounted=Yes, Supplier 1=Digi-Key
U11 U12: "General Purpose Amplifier 2 Circuit 8-DFN (2x2)", Package / Case="8-DFN (2x2)", Supplier Part Number 1=497-12007-1-ND, HelpURL=https://www.st.com/content/ccc/resource/technical/document/datasheet/61/46/87/01/98/ed/44/c5/CD00000464.pdf/files/CD00000464.pdf/jcr:content/translations/en.CD00000464.pdf, Mounted=Yes, Supplier 1=Digikey
X1: "40 MHz ±10ppm Crystal 8pF 50 Ohms 4-SMD, No Lead", Supplier Part Number 1=478-CX2016DB40000D0FLJCCCT-ND, Supplier 1=Digikey

## Nets (pads, with @x,y where several pads share a name; then routed paths per layer and width w, separated by ;. In a path a pad name is that pad's centre, name@x,y a point inside that pad or via, vN(x,y) a via of type N, cw(c..) or ccw(c..) an arc to the next point about the centre after c; other vN are vias at no path point)
3V3: C2.2 C3.2 C4.2 C9.2 C10.2 C11.2 C12.2 C13.2 C14.2 C15.2 C16.2 C25.2 C26.2 C27.2 C28.2 C37.2 C38.2 C64.2 L1.2 LED2.2 P2.1 R3.2 R4.2 T*.2 U1.20 U1.29 U1.46 U1.55 U1.56 U2.3 U4.1 U4.2 U7.3 U7.6 U8.3 U8.6 U10.3 U10.6
5V: C20.2 C21.2 C22.2 C23.2 C24.2 J9.1 L2.2 LED1.2 R27.2 R28.2 R29.2 T*.1 U3.1 U4.4 U4.6 U11.8
5V_USB: D1.5 P1.A4B9 P1.B4A9
24V_RAW: C18.2 C19.2 C29.2 C30.2 C39.2 C40.2 C41.2 C42.2 C43.2 C44.2 C45.2 C46.2 C47.2 C48.2 C49.2 C53.2 C54.2 C55.2 C56.2 C57.2 C58.2 C59.2 C60.2 C61.1 C62.1 C63.1 U3.2 U3.3 U5.7 U6.7 U9.7
CAN_H: D2.2 U2.7
CAN_L: D2.1 U2.6
CAN_RX: U2.4
CAN_TX: U2.1
CC1: D1.4 P1.A5 R1.2
CC2: D1.3 P1.B5 R2.2
current_P1: U7.5
current_P2: U8.5
current_P3: U10.5
EN: C5.2 R3.1 SW1.1 U1.4
GND: C1.1 C2.1 C3.1 C4.1 C5.1 C6.1 C7.1 C8.1 C9.1 C10.1 C11.1 C12.1 C13.1 C14.1 C15.1 C16.1 C18.1 C19.1 C20.1 C21.1 C22.1 C23.1 C24.1 C25.1 C26.1 C27.1 C28.1 C31.1 C32.1 C33.1 C34.1 C35.1 C36.1 C37.1 C38.1 C40.1 C41.1 C42.1 C43.1 C44.1 C45.1 C46.1 C47.1 C48.1 C49.1 C50.1 C51.1 C52.1 C53.1 C54.1 C55.1 C56.1 C57.1 C58.1 C59.1 C60.1 C61.2 C62.2 C63.2 C64.1 D1.2 D2.3 D3.3 D3.8 J8.4 J9.5 P1.13 P1.A1B12 P1.B1A12 P2.4 R1.1 R2.1 R5.1 R6.1 R15.1 R16.1 R17.1 R18.1 R23.1 R24.1 R26.1 R31.1 R33.1 SW1.3 SW2.3 U1.57 U2.2 U3.4 U4.3 U4.7 U5.1 U6.1 U7.2 U7.7 U8.2 U8.7 U9.1 U10.2 U10.7 U11.4 X1.2 X1.4
hall_P1: R25.2 R26.2
hall_P2: R30.2 R31.2
hall_P3: R32.2 R33.2
IN_P1: R7.1
IN_P2: R9.1
IN_P3: R19.1
INH_P1: R11.1
INH_P2: R12.1
INH_P3: R21.1
IO0: C6.2 R4.1 SW2.1 U1.5
IS_P1: C33.2 R15.2 U5.6
IS_P2: C35.2 R17.2 U6.6
IS_P3: C51.2 R23.2 U9.6
NetC1_2: C1.2 L1.1 U1.2 U1.3
NetC7_2: C7.2 T1.1 X1.1
NetC8_2: C8.2 U1.53 X1.3
NetC17_1: C17.1 U3.6
NetC17_2: C17.2 L2.1 U3.5
NetC34_2: C34.2 R16.2 U5.5
NetC36_2: C36.2 R18.2 U6.5
NetC52_2: C52.2 R24.2 U9.5
NetJ1_1: U1.52
NetJ2_1: U1.51
NetJ8_1: J8.1 T*.3
NetJ9_2: J9.2 R27.1 U11.3
NetJ9_3: J9.3 R28.1 U11.5
NetJ9_4: J9.4 R29.1 U12.5
NetLED1_1: LED1.1 R5.2
NetLED2_1: LED2.1 R6.2
NetR7_2: R7.2 U5.2
NetR8_1: R8.1 R13.1 U5.4 U5.8 U7.8
NetR9_2: R9.2 U6.2
NetR10_1: R10.1 R14.1 U6.4 U6.8 U8.8
NetR11_2: R11.2 U5.3
NetR12_2: R12.2 U6.3
NetR19_2: R19.2 U9.2
NetR20_1: R20.1 R22.1 U9.4 U9.8 U10.8
NetR21_2: R21.2 U9.3
NetR25_1: R25.1 U11.1 U11.2
NetR30_1: R30.1 U11.6 U11.7
NetR32_1: R32.1 U12.6 U12.7
NetT1_2: T1.2 U1.54
NetT2_1: T2.1 U1.26
NetT3_1: T3.1 U1.25
Phase_1: C29.1 C31.2 J5.1 R8.2 R13.2 U7.1
Phase_2: C30.1 C32.2 J6.1 R10.2 R14.2 U8.1
Phase_3: C39.1 C50.2 J7.1 R20.2 R22.2 U10.1
RX0: P2.2 U1.50
SPI_CS1: D3.5 J8.6
SPI_MISO: D3.4 J8.5
SPI_MOSI: D3.2 J8.3
SPI_SCK: D3.1 J8.2
TX0: P2.3 U1.49
USB_N: D1.6 P1.A7 P1.B7 T3.2
USB_P: D1.1 P1.A6 P1.B6 T2.2
pads on no net: D3.6 D3.7 D3.9 D3.10 J8.S1 J8.S2 J9.P1 J9.P2 P1. P1.A8 P1.B8 SW1.2 SW1.4 SW2.2 SW2.4 U1.1 U1.6 U1.7 U1.8 U1.9 U1.10 U1.11 U1.12 U1.13 U1.14 U1.15 U1.16 U1.17 U1.18 U1.19 U1.21 U1.22 U1.23 U1.24 U1.27 U1.28 U1.30 U1.31 U1.32 U1.33 U1.34 U1.35 U1.36 U1.37 U1.38 U1.39 U1.40 U1.41 U1.42 U1.43 U1.44 U1.45 U1.47 U1.48 U2.5 U2.8 U4.5 U7.4 U8.4 U10.4 U11.9 U12.1 U12.2 U12.3 U12.4 U12.8 U12.9

## Silkscreen, mask and mechanical layers (free items; w line width, h text height)
Board:
  circle w0.2: c35,30 r30

## Text inside footprints (layer, text, board x,y; h text height)
LED1: Top Overlay "3V3" at 115.378,44.091 h1.2 r90
T*: Top Overlay "24V" at 154.262,66.415 h1.2; Top Overlay "12V" at 151.891,66.415 h1.2